# Altium PCB PCB1.PcbDoc
Units mm, origin at the board's own origin, x right, y up, seen from the top; angles counter-clockwise.
Board outline 99.55 x 75.25 mm, 2 copper layers (Top Layer, Bottom Layer); 21 components, 21 nets, 94 pads, 29 vias.
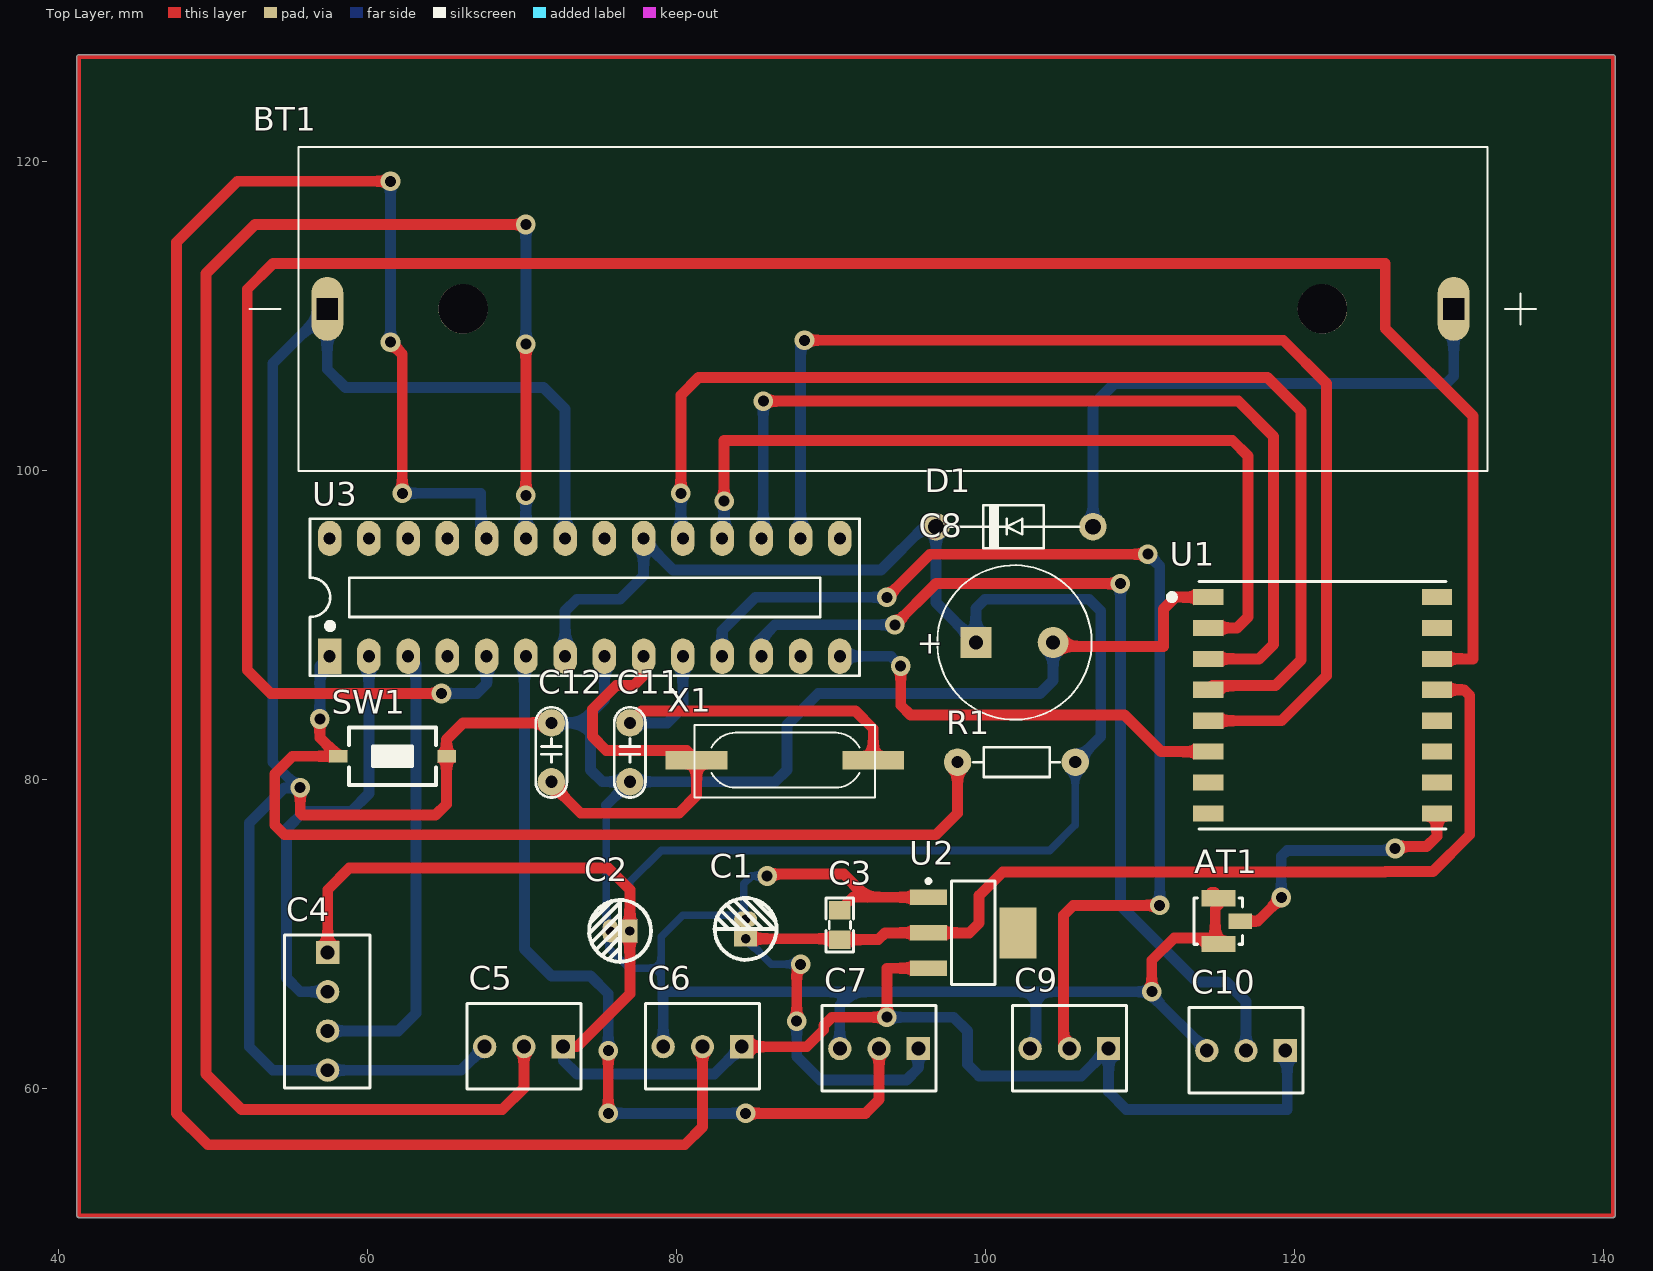
[diagram p0: Top Layer view]
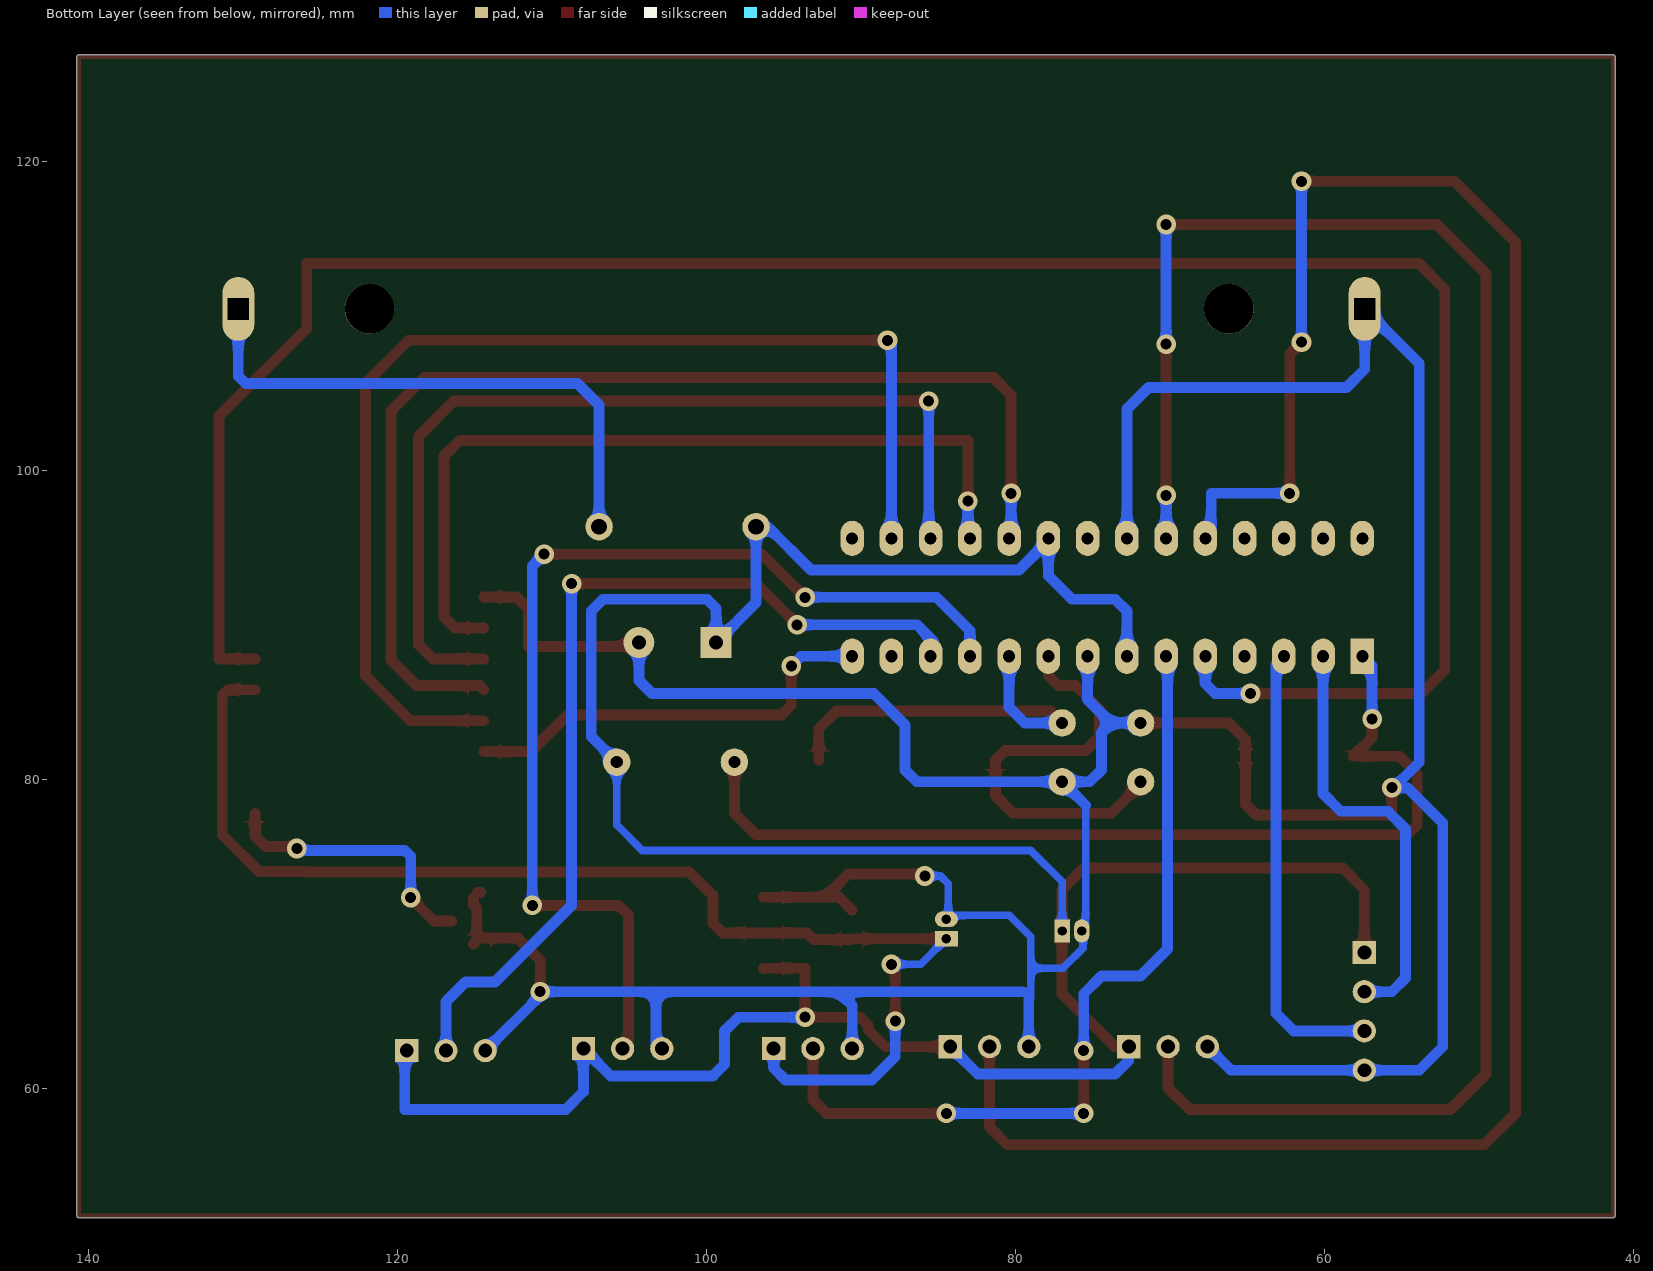
[diagram p1: Bottom Layer view, seen from below]
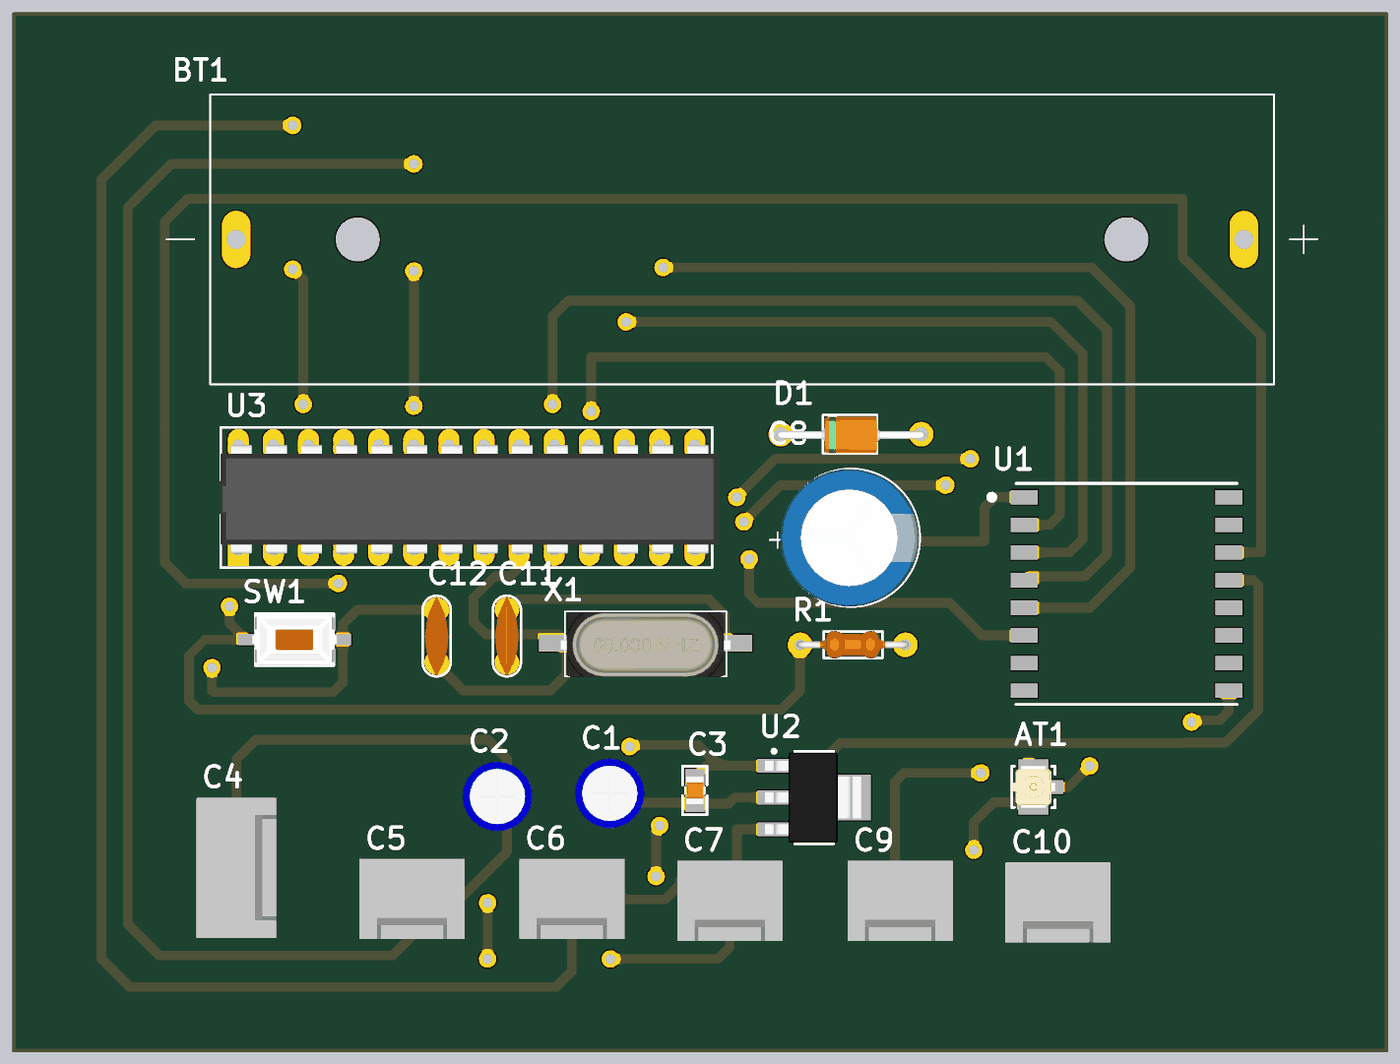
[diagram p2: 3D render of the assembled board from above, using the file's embedded part models]

## Layer stack, top to bottom
Top Solder: solder mask 0.0102, Solder Resist, Dk 3.5
Top Layer: signal copper 0.0356
Dielectric 1: dielectric 0.32, FR-4, Dk 4.8
Bottom Layer: signal copper 0.0356
Bottom Solder: solder mask 0.0102, Solder Resist, Dk 3.5

## Board outline
41.3,51.673 cw(c41.3,51.8) 41.173,51.8 41.173,126.8 cw(c41.3,126.8) 41.3,126.927 140.6,126.927 cw(c140.6,126.8) 140.727,126.8 140.727,51.8 cw(c140.6,51.8) 140.6,51.673

## Design rules (kind name [scope] priority, off if disabled: settings)
Clearance [All] p1: gap=0.2 ignorepadtopadclearanceinfootprint=FALSE
PolygonConnect [All] p1: connectstyle=Relief reliefconductorwidth=0.254 reliefentries=4 polygonreliefangle="90 Angle" airgapwidth=0.254
RoutingVias [All] p1: holewidth=0.711 width=1.27 viastyle="Through Hole" minholewidth=0.711 minwidth=1.27 maxholewidth=0.711 maxwidth=1.27
SolderMaskExpansion [All] p1: expansion=0.102
Width [All] p1: maxlimit=0.7 minlimit=0.5 preferedwidth=0.7
30 further rules are at their usual default settings.

## Components (designator, comment, footprint, x,y, rotation, side; value= is the part's Value field where it differs from the comment)
AT1 "IPEX_CON" U.FL/UMCC 115.062,70.866 r0 top
BT1 "BK-18650-PC2" BAT_BK-18650-PC2 93.98,110.49 r180 top
C1 "10uF" "tu hoa 4mm" 84.455,70.358 r90 top
C2 "10uF" "tu hoa 4mm" 76.327,70.231 r180 top
C3 "106" "Tu 0805" 90.551,70.612 r90 top
C4 "Header4" HDR4 57.404,68.834 r270 top
C5 "Header5" HDR3 72.644,62.738 r180 top
C6 "Header6" HDR3 84.201,62.738 r180 top
C7 "Header7" HDR3 95.631,62.611 r180 top
C8 "CN-ALU-DIP" CA-ALU-10BL 101.854,88.9 r0 top value=104
C9 "Header8" HDR3 107.95,62.611 r180 top
C10 "Header9" HDR3 119.38,62.484 r180 top
C11 "16" CN1.5 76.962,83.693 r270 top value=0.01uF
C12 "16" CN1.5 71.882,83.693 r270 top value=0.01uF
D1 "Diode" DIO-1A 106.934,96.393 r180 top value=1N5007
R1 "Res" RES-1/8W 102.108,81.153 r180 top
SW1 "SW" SW1-SMD 61.595,81.534 r0 top value="SW chip 2 pin"
U1 "RFM95W-868S2" XCVR_RFM95W-868S2 121.793,84.836 r0 top
U2 "LM1117-3.3V" SOT223 99.187,70.104 r270 top
U3 "ATmega328-PU" DIP28 57.531,88.011 r0 top
X1 "16Mhz" XTAL-RU49/4 91.948,81.28 r180 top value=4Mhz

## Footprints (in the part's own frame and the unit in brackets; to place one, negate y for a bottom-side part, rotate by r counter-clockwise, add the part's x,y. Pads: shape width x height; smd on the part's side, far side on the other; paste and mask are expansions set on the pad)
BAT_BK-18650-PC2 [mm]
  oval 2.07x4.14 hole 1.38 square: NEG(36.6,0) POS(-36.3,0)
  round 3.2 hole 3.2 unplated: ""(-27.805,0) ""(27.81,0)
  silkscreen extent -41.63,-10.49 41.63,10.49
CA-ALU-10BL [mm] "Polarized capacitors, Aluminum Electrolytic Capacitors, 2-Leads, Body 10x20x5x0.6"
  rect 2x2 hole 0.9: 1(-2.5,0)
  round 2 hole 0.9: 2(2.5,0)
  silkscreen extent -5,-5 5,5, body extent -5.13,-5 4.88,5, height 16.2
CN1.5 [mil]
  round 70 hole 31: 1(0,0) 2(150,0)
  silkscreen extent -40,-40 190,40, body extent -40,-33 190,33, height 235
DIO-1A [mil]
  round 70 hole 40: 1(0,0) 2(400,0)
  silkscreen extent 35,-55 365,55, body extent -11,-50 411,54, height 102
DIP28 [mil] "DIP, 18-Leads, Row Spacing 7.62mm, Pitch 2.54mm, Body 22.8x7.3mm, Window"
  rect 60x90 hole 31: 1(0,0)
  oval 60x90 hole 31: 2(100,0) 3(200,0) 4(300,0) 5(400,0) 6(500,0) 7(600,0) 8(700,0) 9(800,0) 10(900,0) 11(1000,0) 12(1100,0) 13(1200,0) 14(1300,0) 15(1300,300) 16(1200,300) 17(1100,300) 18(1000,300) 19(900,300) 20(800,300) 21(700,300) 22(600,300) 23(500,300) 24(400,300) 25(300,300) 26(200,300) 27(100,300) 28(0,300)
  silkscreen extent -50,-50 1350,350, body extent -50,-10 1367,300, height 200
HDR3 [mm] "Connector; Header; 3 Position"
  rect 1.5x1.5 hole 0.9: 1(0,0)
  round 1.5 hole 0.9: 2(2.54,0) 3(5.08,0)
  silkscreen extent -1.14,-2.79 6.22,2.74, body extent -1.27,-2.92 6.35,2.88, height 11.72
HDR4 [mm] "Connector; Header; 4 Position"
  rect 1.5x1.5 hole 0.9: 1(0,0)
  round 1.5 hole 0.9: 2(2.54,0) 3(5.08,0) 4(7.62,0)
  silkscreen extent -1.14,-2.79 8.76,2.74, body extent -1.27,-2.92 8.89,2.88, height 11.72
RES-1/8W [mil]
  round 70 hole 31: 1(-145,0) 2(155,0)
  silkscreen extent -105,-38 115,38, body extent -154,-40 164,39, height 79
SOT223 [mm]
  rect 1x2.4 smd: 1(-2.3,-2.9) 2(0,-2.9) 3(2.3,-2.9)
  rect 3.3x2.4 smd: 4(0,2.9)
  silkscreen extent -3.47,-3.02 3.35,1.4, body extent -3.25,-3.56 3.25,3.4, height 1.68
SW1-SMD [mm]
  rect 1.2x0.8 smd: 1(-3.5,0) 2(3.5,0)
  silkscreen extent -2.82,-1.85 2.82,1.85, body extent -3.05,-1.85 3.05,1.85, height 2.5
"Tu 0805" [mm] "Compoment SMD 80x50mil"
  rect 1.2x1.4 smd: 1(-0.946,-0.003) 2(0.954,-0.003)
  silkscreen extent -1.75,-0.89 1.75,0.89, body extent -1.01,-0.64 1.01,0.63, height 0.61
"tu hoa 4mm" [mm]
  rect 1x1.5 hole 0.6: 1(-0.635,0)
  oval 1x1.5 hole 0.6: 2(0.635,0)
  silkscreen extent -2,-2 2.01,2.01, body extent -2.47,-2.47 2.58,2.58, height 14.81
U.FL/UMCC [mm] "U.FL (UMCC) Connector Jack, Male Pin 50Ohm Surface Mount Solder"
  rect 1.5x1 smd: 1(1.4,0)
  rect 2.2x1.05 smd: 2(0,-1.475) 2(0,1.475)
  Top Layer pour cut-out: -1.2,0 -1.109,-0.459 -0.849,-0.849 -0.459,-1.109 0,-1.2 0,-1.2 0,-1.2 0.457,-1.109 0.845,-0.85 1.104,-0.462 1.195,-0.005 1.195,-0.005 1.195,0.005 1.104,0.462 0.845,0.85 0.457,1.109 0,1.2 0,1.2 0,1.2 -0.459,1.109 -0.849,0.849 -1.109,0.459 -1.2,0
  Top Layer pour cut-out: 0,0
  silkscreen extent -1.58,-1.5 1.55,1.5, body extent -1.55,-1.5 1.55,1.5, height 1.25
XCVR_RFM95W-868S2 [mm]
  rect 1.95x1.05 smd: 1(-7.4,7) 2(-7.4,5) 3(-7.4,3) 4(-7.4,1) 5(-7.4,-1) 6(-7.4,-3) 7(-7.4,-5) 8(-7.4,-7) 9(7.4,-7) 10(7.4,-5) 11(7.4,-3) 12(7.4,-1) 13(7.4,1) 14(7.4,3) 15(7.4,5) 16(7.4,7)
  silkscreen extent -10.04,-8 8,8
XTAL-RU49/4 [mm]
  rect 4x1.2 smd: 1(-0.762,0) 2(10.668,0)
  silkscreen extent -0.89,-2.29 10.8,2.41, body extent -1.2,-2.22 11.1,2.48, height 4.3

## Part data
AT1: library part LTI-IPXSM66AL, "IPEX CONNECTER ANTENNA GPS GSM", MPN=LTI-IPXSM66AL, Solder=SMT
BT1: "Battery Holder _Open_ 18650 1 Cell PC Pin", Package=None, Availability=Unavailable, MF=MPD, MP=BK-18650-PC2, Price=None, SnapEDA_Link=https://www.snapeda.com/parts/BK-18650-PC2/MPD/view-part/4480461/?ref=snap
C1 C2: library part "Tu Hoa 10uF 25V 4x7", "C?m", Chung_Loai=C?m, Don_Vi=Con, Ma_Hang=MH001349, So_Chan=2, Ten_Linh_Kien="T? H骯 10uF 25V 4x7MM"
C3: library part "Tu 0805 106 16V 10%", "D醤", Chung_Loai=D醤, Don_Vi=Con, Ma_Hang=MH004553, So_Chan=2, Ten_Linh_Kien="T? 0805 106-10uF 10% 16V"
C4: "Header IDC, 4 x 1 Pin Vertical 2.54mm Pitch (Non-Boxed, Male)", Manufacturer="Würth Elektronik eiSos GmbH", partNo=613002143121, ComponentLink1 Description=Manufacturer, ComponentLink1URL=http://www.we-online.com, ComponentLink2 Description=Datasheet, ComponentLink2URL=http://katalog.we-online.de/em/datasheet/6130xx143121.pdf, Created by="Karrer Zheng", Created Date="29 March 2013", NoPins=02
C5 C6 C7 C9 C10: library part Header3, "Header IDC, 3 x 1 Pin Vertical 2.54mm Pitch (Non-Boxed, Male)", Manufacturer="Würth Elektronik eiSos GmbH", partNo=613002143121, ComponentLink1 Description=Manufacturer, ComponentLink1URL=http://www.we-online.com, ComponentLink2 Description=Datasheet, ComponentLink2URL=http://katalog.we-online.de/em/datasheet/6130xx143121.pdf, Created by="Karrer Zheng", Created Date="29 March 2013", NoPins=02
C8: "Capacitor (Semiconductor SIM Model)", LatestRevisionDate=17-Jul-2002, LatestRevisionNote="Re-released for DXP Platform.", PackageReference=C1206, Publisher="Altium Limited"
C11 C12: library part CN1.5, "Cap np 682pF => 104pF"
D1: "Default Diode", Code - JEDEC=DO-214-AB, Published=8-Jun-2000, Publisher="Altium Limited", Revision="July-2002: Re-released for DXP Platform."
R1: Manufacturer="Generic Components", Class=Passive, Published=08/06/2000, Publisher="Altium Hobart Technology Centre", SubClass=R
SW1: library part SW2, "Switch button 2 pin"
U1: "General ISM < 1GHz LoRa™ Transceiver Module 868MHz Antenna Not Included Surface Mount", Package="SMD-16 Hope Microelectronics", Availability=Unavailable, MF=RF, MP=RFM95W-868S2, Price=None, SnapEDA_Link=https://www.snapeda.com/parts/RFM95W-868S2/RF%20Solutions/view-part/329180/?ref=snap
U2: library part LM1117, "800mA Low-Dropout Linear Regulator", Creator="Nguyen Ba Bien", Website=http://group3i.net
U3: "8-bit AVR Microcontroller, 32KB Flash, 1KB EEPROM, 2KB SRAM, 28-pin PDIP, Industrial Grade (-40癈 to 85癈)", Supplier Part Number 1=ATMEGA328-PU-ND, ComponentLink1Description="Manufacturer Link", ComponentLink1URL=http://www.atmel.com/products/avr/default.asp?, ComponentLink2Description="ATmega48A/48PA/88A/88PA/168A/168PA/328/328P Datasheet", ComponentLink2URL=http://www.atmel.com/dyn/resources/prod_documents/8271.pdf, ComponentLink3Description="ATmega48A/48PA/88A/88PA/168A/168PA/328/328P Summary", ComponentLink3URL=http://www.atmel.com/dyn/resources/prod_documents/8271S.pdf, ComponentLink4Description="Atmel.com Home", ComponentLink4URL=http://www.atmel.com, DatasheetVersion="revA, Jan-2010", PackageDescription="28-lead (0.300\"/7.62mm Wide) Plastic Dual Inline Package (PDIP)", PackageReference=28P3, PackageVersion="revB, Sep-2001", Published=1-Apr-2010, Publisher="Altium Limited", Supplier 1=Digi-Key, Supplier 2=Mouser, Supplier Part Number 2=556-ATMEGA328-PU
X1: library part XT2, "Crystal, 32.768 KHz, -40 to 85 degC, 3.2 x 1.5 x 0.9 mm SMD"

## Via types
v1: diameter 1.27, hole 0.711, Top Layer to Bottom Layer, 29 vias

## Nets (pads, with @x,y where several pads share a name; then routed paths per layer and width w, separated by ;. In a path a pad name is that pad's centre, name@x,y a point inside that pad or via, vN(x,y) a via of type N, cw(c..) or ccw(c..) an arc to the next point about the centre after c; other vN are vias at no path point)
3v3: C1.1 C3.1 C7.1 U1.13 U2.2 | length 82.4
  Top Layer w0.7: C1.1 90.498,69.723 C3.1 93.034,69.666 93.472,70.104 U2.2 98.933,70.104 99.568,70.739 99.568,72.517 101.092,74.041 125.843,74.041 125.874,74.072 128.936,74.072 131.318,76.454 131.318,85.471 130.953,85.836 U1.13 ; v1(87.757,64.389) 87.757,67.818 v1(88.011,68.072)
  Bottom Layer w0.5: C1.1 86.106,68.072 v1(88.011,68.072)
  Bottom Layer w0.7: v1(87.757,64.389) 87.757,62.103 89.281,60.579 94.869,60.579 95.631,61.341 C7.1
A0: C5.2 U3.23 | length 118.9
  Top Layer w0.7: C5.2 70.104,60.071 68.707,58.674 51.816,58.674 49.53,60.96 49.53,112.776 52.705,115.951 v1(70.231,115.951) ; v1(70.231,98.425) v1(70.231,108.204)
  Bottom Layer w0.7: U3.23 v1(70.231,98.425) ; v1(70.231,108.204) v1(70.231,115.951)
A1: C6.2 U3.24 | length 141.1
  Top Layer w0.7: v1(61.468,108.331) 62.23,107.569 v1(62.23,98.552) ; v1(61.468,118.745) 51.562,118.745 47.625,114.808 47.625,58.42 49.657,56.388 80.518,56.388 81.661,57.531 C6.2
  Bottom Layer w0.7: v1(61.468,108.331) v1(61.468,118.745) ; v1(62.23,98.552) 67.31,98.552 67.31,96.012 U3.24
D4: C7.2 U3.6 | length 54.6
  Top Layer w0.7: v1(75.565,58.42) v1(75.565,62.484) ; v1(84.455,58.42) 92.202,58.42 93.091,59.309 C7.2
  Bottom Layer w0.7: U3.6 70.135,87.915 70.135,69.057 71.882,67.31 74.422,67.31 75.565,66.167 v1(75.565,62.484) ; v1(75.565,58.42) v1(84.455,58.42)
D5: C9.2 U3.11 | length 69.6
  Top Layer w0.7: v1(93.599,91.821) 96.393,94.615 v1(110.49,94.615) ; C9.2 105.029,62.992 105.029,71.247 105.664,71.882 v1(111.252,71.882)
  Bottom Layer w0.7: U3.11 82.931,89.662 85.09,91.821 v1(93.599,91.821) ; v1(110.49,94.615) 111.252,93.853 v1(111.252,71.882)
D6: C10.2 U3.12 | length 60.6
  Top Layer w0.7: v1(94.107,90.043) 96.774,92.71 v1(108.712,92.71)
  Bottom Layer w0.7: U3.12 85.471,89.154 86.36,90.043 v1(94.107,90.043) ; v1(108.712,92.71) 108.712,71.882 113.665,66.929 115.57,66.929 116.84,65.659 C10.2
DIO0: U1.14 U3.5 | length 147.4
  Top Layer w0.7: v1(64.77,85.598) 53.721,85.598 52.197,87.122 52.197,111.76 53.855,113.418 125.85,113.418 125.857,113.411 125.857,109.22 131.524,103.553 131.524,87.836 U1.14
  Bottom Layer w0.7: v1(64.77,85.598) 67.056,85.598 67.691,86.233 U3.5
GND: AT1.2 BT1.NEG C1.2 C2.2 C3.2 C4.4 C5.3 C6.3 C7.3 C8.2 C9.3 C10.3 C11.2 C12.1 SW1.2 U1.1 U2.1 U3.8 U3.22 | length 280.6
  Top Layer w0.7: v1(55.626,79.502) 55.626,77.851 55.753,77.724 64.389,77.724 65.095,78.43 SW1.2 65.095,82.621 66.167,83.693 C12.1 ; v1(85.852,73.787) 85.979,73.914 90.805,73.914 92.315,72.404 ; C3.2 91.392,72.404 92.315,72.404 ; U2.1 92.315,72.404 ; C8.2 104.608,88.646 111.506,88.646 111.506,91.059 112.283,91.836 U1.1 ; v1(110.744,66.294) 110.744,68.326 112.19,69.772 114.681,69.772 AT1.2@114.854,69.599 ; AT1.2@114.6,72.722 AT1.2@114.808,72.722 ; AT1.2@115.062,69.391 AT1.2@114.854,69.599 ; AT1.2@115.062,72.341 115.062,71.93 114.854,71.721 AT1.2@114.854,69.599
  Bottom Layer w0.5: 75.438,78.359 75.438,70.397 75.604,70.231 75.604,69.126 76.912,67.818 78.994,67.818 ; 78.994,65.786 78.994,67.818 ; C1.2 C1.2@84.328,71.12 ; v1(85.852,73.787) 84.836,73.787 84.328,73.279 C1.2@84.328,71.12 ; 78.994,67.818 78.994,69.85 80.391,71.247 84.201,71.247 C1.2@84.328,71.12
  Bottom Layer w0.7: v1(55.626,79.502) v1@55.499,79.502 ; C5.3 66.04,61.214 C4.4 53.848,61.214 52.324,62.738 52.324,77.216 54.61,79.502 v1@55.499,79.502 ; C12.1 73.787,83.693 ; U3.22 72.771,104.013 71.374,105.41 58.547,105.41 57.38,106.577 BT1.NEG 53.848,106.958 53.848,81.153 v1@55.499,79.502 ; U3.8 75.311,85.217 73.787,83.693 ; 75.438,78.359 C11.2 ; C6.3 79.121,65.913 ; 79.502,66.294 91.44,66.294 ; C7.3 90.551,65.405 91.44,66.294 ; C9.3 103.251,62.992 103.251,66.294 ; C8.2 104.354,86.447 103.505,85.598 89.154,85.598 87.122,83.566 87.122,80.645 86.36,79.883 C11.2 ; C10.3 110.744,66.04 v1(110.744,66.294) 103.251,66.294 ; 73.787,83.693 74.422,83.058 74.422,80.645 75.184,79.883 C11.2 ; 91.44,66.294 103.251,66.294
MISO: U1.2 U3.18 | length 54.2
  Top Layer w0.7: v1@82.931,97.917 v1(83.058,98.044) 83.058,101.981 115.951,101.981 116.967,100.965 116.967,90.551 116.252,89.836 U1.2
  Bottom Layer w0.7: U3.18 83.058,95.758 v1(83.058,98.044)
MOSI: U1.3 U3.17 | length 61
  Top Layer w0.7: v1(85.598,104.521) 116.332,104.521 118.618,102.235 118.618,88.773 117.681,87.836 U1.3
  Bottom Layer w0.7: U3.17 85.598,95.758 v1(85.598,104.521)
NetAT1_1: AT1.1 U1.9 | length 18
  Top Layer w0.7: AT1.1 117.602,70.866 117.983,71.247 v1(119.126,72.39) ; v1(126.492,75.565) 126.619,75.692 128.524,75.692 129.193,76.361 U1.9
  Bottom Layer w0.7: v1(119.126,72.39) 119.126,75.057 119.507,75.438 126.365,75.438 v1(126.492,75.565)
NetBT1_POS: BT1.POS D1.1 | length 36.3
  Bottom Layer w0.7: D1.1 106.934,104.267 108.331,105.664 129.794,105.664 130.28,106.15 BT1.POS
NetC11_1: C11.1 U3.10 X1.1 | length 25.7
  Top Layer w0.7: C11.1 77.724,84.455 91.567,84.455 92.71,83.312 X1.1
  Bottom Layer w0.7: C11.1 79.375,83.693 80.391,84.709 U3.10
NetC12_2: C12.2 U3.9 X1.2 | length 27.7
  Top Layer w0.7: C12.2 71.882,79.756 73.787,77.851 80.137,77.851 81.28,78.994 X1.2 80.645,81.915 75.438,81.915 74.549,82.804 74.549,84.582 75.977,86.01 75.982,86.01 76.078,86.106 77.216,86.106 77.851,86.741 U3.9
NetR1_2: R1.2 SW1.1 U3.1 | length 63.5
  Top Layer w0.7: v1(56.896,83.947) 56.896,82.733 SW1.1 55.118,81.534 53.975,80.391 53.975,77.089 54.61,76.454 96.774,76.454 98.171,77.851 R1.2
  Bottom Layer w0.7: v1(56.896,83.947) 56.896,87.376 U3.1
RST: U1.6 U3.14 | length 27.9
  Top Layer w0.7: v1(94.488,87.376) 94.488,84.836 95.123,84.201 108.966,84.201 111.331,81.836 U1.6
  Bottom Layer w0.7: U3.14 93.853,88.011 v1(94.488,87.376)
RX: C4.2 U3.2 | length 27.9
  Bottom Layer w0.7: C4.2 55.626,66.294 54.737,67.183 54.737,76.835 55.88,77.978 58.928,77.978 60.071,79.121 U3.2
SCK: U1.4 U3.19 | length 73.8
  Top Layer w0.7: v1(80.264,98.552) 80.264,104.902 81.407,106.045 118.237,106.045 120.396,103.886 120.396,87.757 118.745,86.106 114.663,86.106 U1.4
  Bottom Layer w0.7: v1(80.264,98.552) 80.264,95.758 U3.19
SS: U1.5 U3.16 | length 75.7
  Top Layer w0.7: v1(88.265,108.458) 119.253,108.458 122.047,105.664 122.047,86.741 119.142,83.836 U1.5
  Bottom Layer w0.7: U3.16 88.011,108.204 v1(88.265,108.458)
TX: C4.3 U3.3 | length 29.5
  Bottom Layer w0.7: C4.3 61.976,63.754 63.119,64.897 63.119,87.503 U3.3
VCC: C2.1 C4.1 C5.1 C6.1 C8.1 C9.1 C10.1 D1.2 R1.1 U2.3 U3.7 U3.20 | length 203.3
  Top Layer w0.7: C4.1 57.404,72.898 58.801,74.295 75.565,74.295 76.962,72.898 C2.1 76.962,66.167 73.533,62.738 C5.1 ; C6.1 88.404,62.738 89.504,63.838 89.504,64.104 90.043,64.643 v1(93.599,64.643) 93.599,67.818 96.273,67.818 U2.3
  Bottom Layer w0.5: C2.1 76.962,73.406 78.994,75.438 104.14,75.438 105.791,77.089 R1.1
  Bottom Layer w0.7: C5.1 72.644,61.849 73.533,60.96 82.423,60.96 C6.1 ; U3.7 72.771,90.932 73.533,91.694 76.327,91.694 77.851,93.218 U3.20@77.851,95.499 ; U3.20 U3.20@77.851,95.499 ; v1(93.599,64.643) 97.917,64.643 98.806,63.754 98.806,61.595 99.568,60.833 106.172,60.833 C9.1 107.95,59.817 109.093,58.674 119.507,58.674 119.507,62.357 C10.1 ; R1.1 107.442,82.804 107.442,90.932 106.68,91.694 99.949,91.694 99.354,91.099 C8.1 96.774,91.48 D1.2 96.012,96.393 93.218,93.599 79.751,93.599 U3.20@77.851,95.499
pads on no net: BT1. U1.7 U1.8 U1.10 U1.11 U1.12 U1.15 U1.16 U2.4 U3.4 U3.13 U3.15 U3.21 U3.25 U3.26 U3.27 U3.28
copper on no net: | length 348.6
  Top Layer w0.254: 41.3,51.8 41.3,126.8 41.7,126.8 140.6,126.8 140.6,51.8 41.3,51.8

## Text inside footprints (layer, text, board x,y; h text height)
C8: Top Overlay "+" at 95.529,88.163 h1.5